# EAGLE board fonte (EAGLE 5.06)
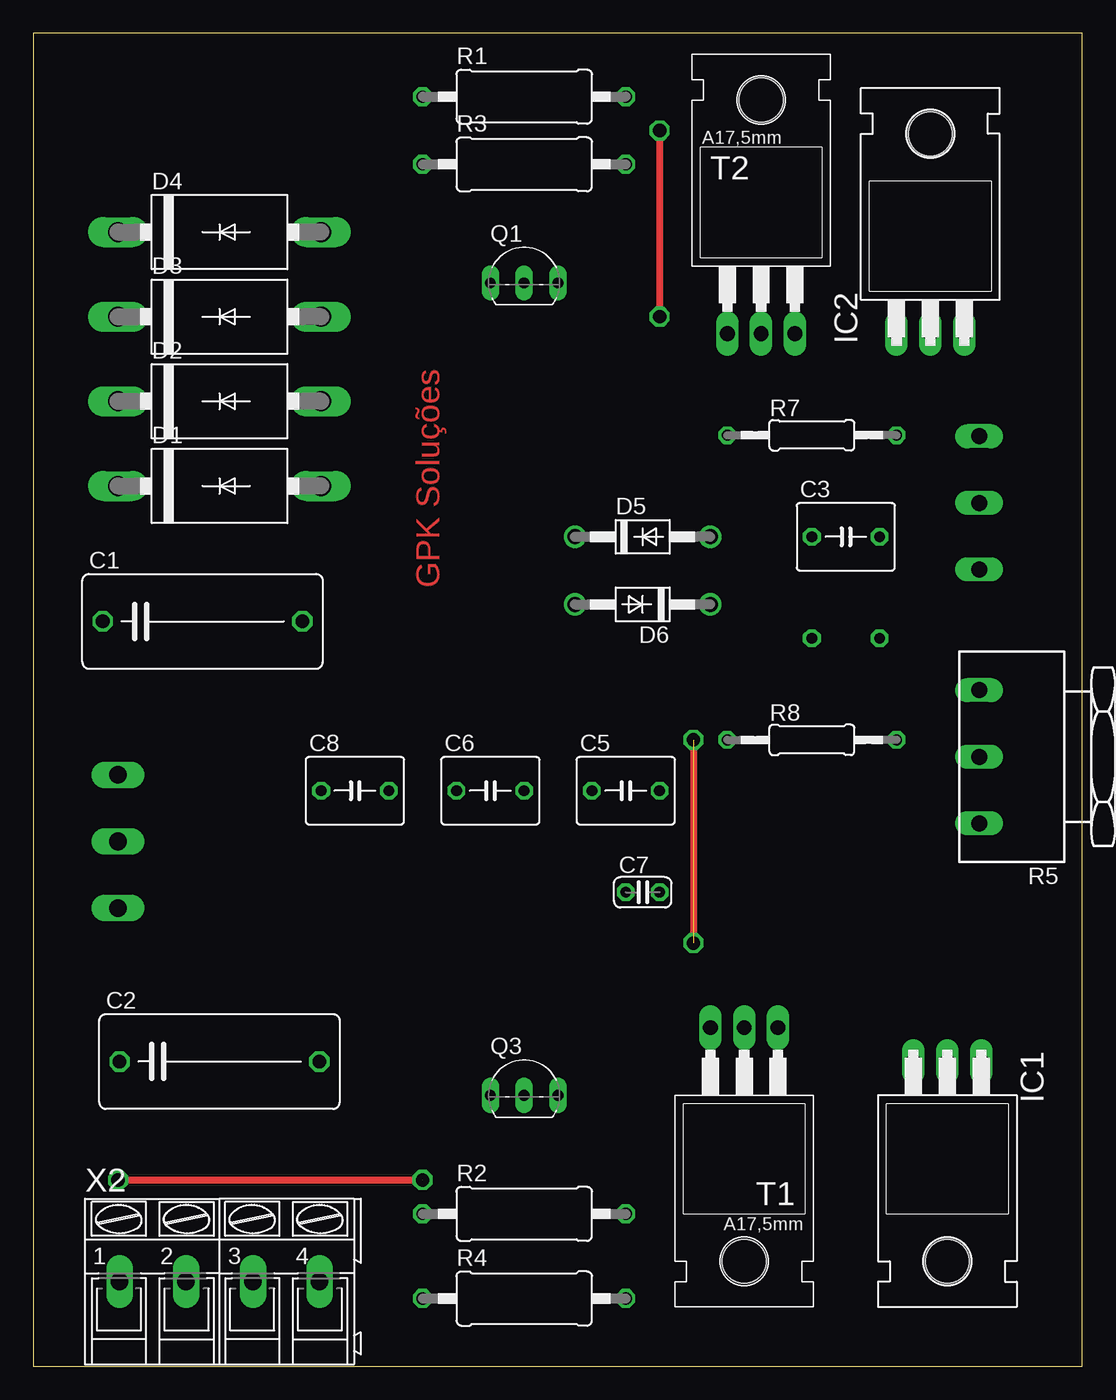
[diagram p0: board, top side]
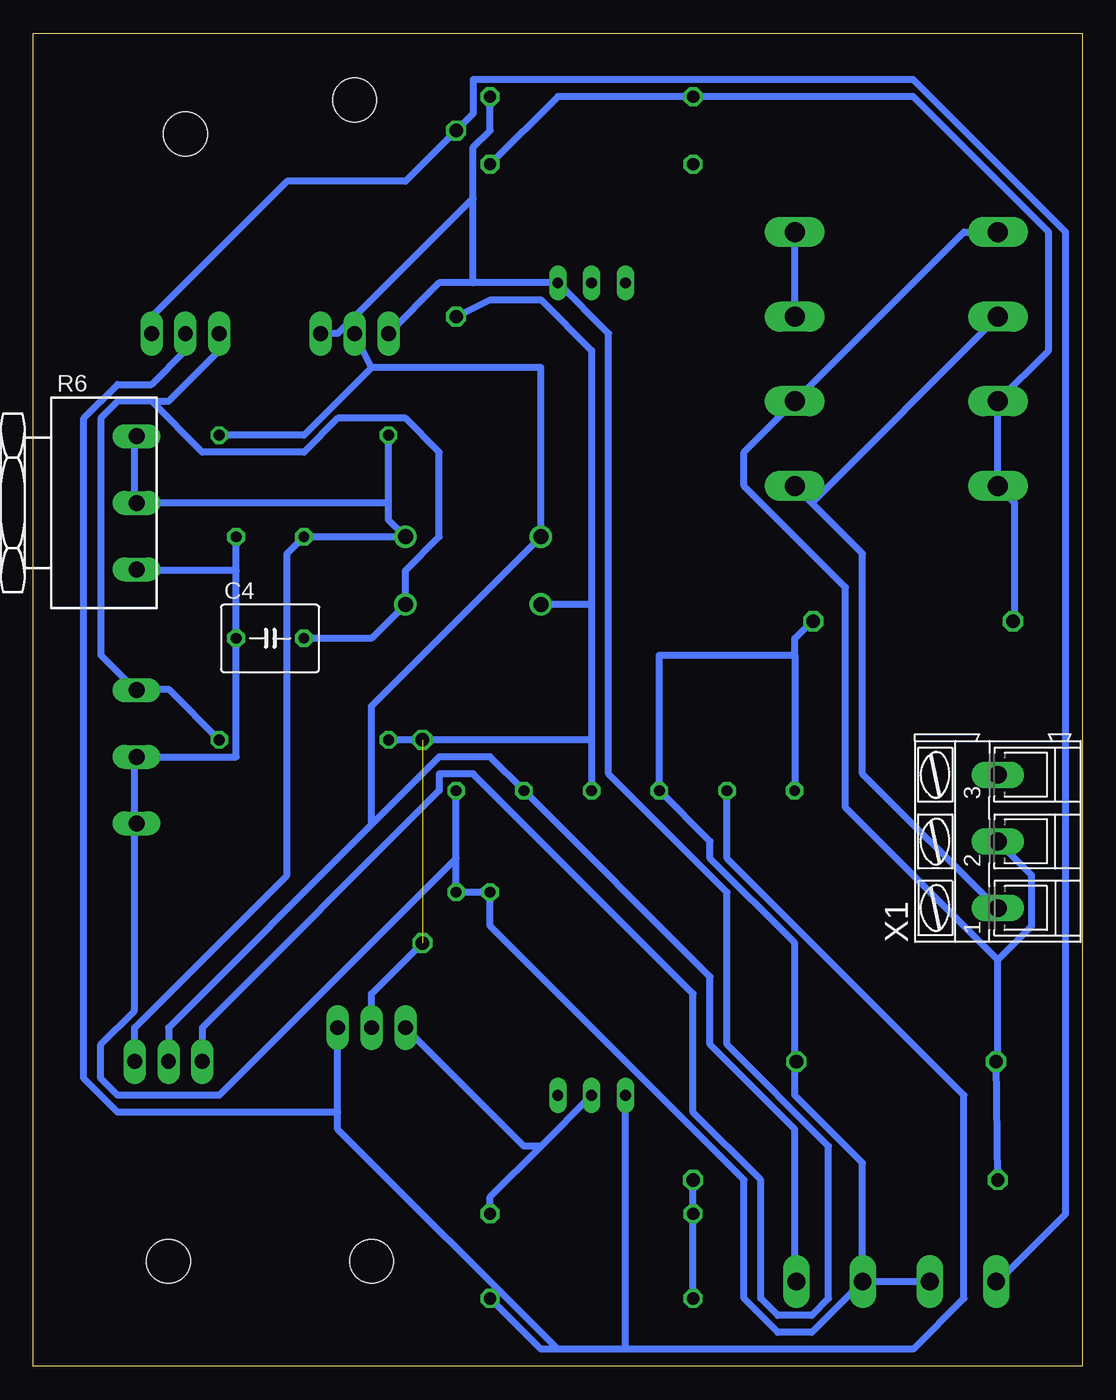
[diagram p1: board, bottom side, seen from below]

Size 78.72 x 100 mm. Coordinates in mm from the lower left corner, seen from the top.
Outline: 0,0 78.72,0 78.72,100 0,100 0,0
Copper layers (1*16): Top 0.035mm / dielectric 1.5mm / Bottom 0.035mm
Design rules "default *": minimum track width 20mil, minimum drill 24mil, track to track 8mil, track to pad 8mil, pad to pad 8mil, via to via 8mil, smd to smd 8mil, copper to edge 40mil, drill to drill 8mil, minimum pad ring 10mil, minimum via ring 8mil, stop-mask expansion 4mil, vias tented up to drill 0mil, thermal gap 10mil

## Footprints (pad centres in the part's own frame; a part is rotated, then mirrored left to right if it is on the bottom)
C150-072X183 = drill 1.016 octagon: 1 -7.493,0; 2 7.493,0
C050-050X075 = drill 0.813 octagon: 1 -2.54,0; 2 2.54,0
C025-024X044 = drill 0.813 octagon: 1 -1.27,0; 2 1.27,0
DO201-15 = drill 1.499 long: A 7.62,0; C -7.62,0
DO41-10 = drill 1.118 round: A 5.08,0; C -5.08,0
TO220H = drill 1.118 long: 1 -2.54,-10.16; 2 0,-10.16; 3 2.54,-10.16 | hole 3.302: 0,4.826
TO92-BCE = drill 0.813 long: B 2.54,0; C 0,0; E -2.54,0
TO92-EBC = drill 0.813 long: B 0,-1.27; C -2.54,-1.27; E 2.54,-1.27
0411/15 = drill 0.914 octagon: 1 -7.62,0; 2 7.62,0
PC16S = drill 1.2 long: 1A -5,6.5; 1E 5,6.5; 1S 0,6.5
0207/12 = drill 0.813 octagon: 1 -6.35,0; 2 6.35,0
TO220 = drill 1.118 long: 1 -2.54,-6.35; 2 0,-6.35; 3 2.54,-6.35 | hole 3.302: 0,11.176
AK300/3 = drill 1.321 long: 1 -5.004,0; 2 0,0; 3 5.004,0
AK300/4 = drill 1.321 long: 1 -7.493,0; 2 -2.515,0; 3 2.515,0; 4 7.493,0

## Placement (x,y rotation side)
C1  [C150-072X183]  12.7,55.88 0 top
C2  [C150-072X183]  13.97,22.86 0 top
C3  [C050-050X075]  60.96,62.23 0 top
C4  [C050-050X075]  60.96,54.61 0 bottom
C5  [C050-050X075]  44.45,43.18 0 top
C6  [C050-050X075]  34.29,43.18 0 top
C7  [C025-024X044]  45.72,35.56 0 top
C8  [C050-050X075]  24.13,43.18 0 top
D1  1N5400  [DO201-15]  13.97,66.04 0 top
D2  1N5400  [DO201-15]  13.97,72.39 0 top
D3  1N5400  [DO201-15]  13.97,78.74 0 top
D4  1N5400  [DO201-15]  13.97,85.09 0 top
D5  1N4004  [DO41-10]  45.72,62.23 0 top
D6  1N4004  [DO41-10]  45.72,57.15 180 top
IC1  337T  [TO220H]  68.58,12.7 180 top
IC2  337T  [TO220H]  67.31,87.63 0 top
Q1  BC636  [TO92-BCE]  36.83,81.28 0 top
Q3  BC618  [TO92-EBC]  36.83,21.59 0 top
R1  [0411/15]  36.83,95.25 0 top
R2  [0411/15]  36.83,11.43 0 top
R3  [0411/15]  36.83,90.17 0 top
R4  [0411/15]  36.83,5.08 0 top
R5  PC16S  [PC16S]  77.47,45.72 90 top
R6  PC16S  [PC16S]  77.47,64.77 270 bottom
R7  [0207/12]  58.42,69.85 0 top
R8  [0207/12]  58.42,46.99 0 top
T1  TIP31  [TO220]  53.34,19.05 180 top
T2  TIP32  [TO220]  54.61,83.82 0 top
X1  [AK300/3]  6.35,39.37 90 bottom
X2  [AK300/4]  13.97,6.35 0 top

## Library data of the parts
C1-C8 = rcl
D1-D6 = diode
IC1 IC2 = linear
Q1 = transistor-pnp
Q3 = transistor-npn
R1-R4 R7 R8 = resistor
R5 R6 = piher
T1 T2 = transistor
X1 X2 = con-ptr500

## Nets
GND: C1.2 C2.2 C3.2 C4.1 C5.2 C6.1 C7.1 C7.2 C8.1 R5.1A R5.1S R6.1E X2.2 X2.3
N$1: D1.A D3.C X1.1
N$2: D3.A D4.A
N$3: C1.1 D1.C D2.C R1.1 R3.2
N$4: C2.1 D2.A D4.C R2.1 R4.1 X1.2
N$5: IC1.3 Q1.B R1.2 T2.1 T2.3
N$6: C5.1 D5.C IC1.2 R7.2 T2.2 X2.4
N$7: C3.1 D5.A IC1.1 R6.1A R6.1S R7.1
N$8: C8.2 IC2.2 Q3.C R4.2 T1.1
N$9: X1.3
N$10: C6.2 D6.A IC2.3 R8.1 T1.2 X2.1
N$11: C4.2 D6.C IC2.1 R5.1E R8.2
N$13: Q3.B R2.2 T1.3

## Tracks (layer width: path | path; a pad name or v marks a point on that pad's centre or on a via)
GND
  Bottom 0.508: 71.12,40.64 71.12,45.72 R5.1S 63.5,45.72 C4.1 63.5,59.69 | 63.5,59.69 C3.2 | 63.5,59.69 69.85,59.69 R6.1E | 21.59,53.34 21.59,54.61 20.32,55.88 C1.2 | 21.59,53.34 C8.1 | 21.59,53.34 31.75,53.34 C6.1 27.94,39.37 27.94,38.1 21.59,31.75 21.59,22.86 | 46.99,38.1 C7.2 C7.1 44.45,33.02 25.4,13.97 25.4,5.08 22.86,2.54 20.32,2.54 16.51,6.35 | 46.99,38.1 C5.2 | 21.59,22.86 21.59,20.32 16.51,15.24 16.51,6.35 | 11.43,6.35 X2.2 X2.3 16.51,6.35 | 21.59,22.86 C2.2 | 71.12,40.64 71.12,26.67 73.66,24.13 73.66,21.59 72.39,20.32 64.77,20.32 46.99,38.1 | 71.12,40.64 R5.1A
N$1
  Bottom 0.508: 20.32,64.77 D1.A | 20.32,64.77 16.51,60.96 16.51,44.45 6.35,34.29 X1.1 | 20.32,64.77 D3.C
N$2
  Bottom 0.508: D3.A D4.A
N$3
  Bottom 0.508: R3.2 39.37,95.25 R1.1 12.7,95.25 2.54,85.09 2.54,76.2 D2.C D1.C 5.08,64.77 5.08,55.88 C1.1
N$4  (via drill 1 pad 1.02)  (1 unrouted)
  Top 0.508: v6.35,13.97 29.21,13.97
  Bottom 0.508: 6.35,30.48 6.35,22.86 C2.1 v6.35,13.97 | 6.35,30.48 3.81,33.02 3.81,36.83 X1.2 | D4.C 8.89,85.09 D2.A 25.4,68.58 25.4,66.04 17.78,58.42 17.78,41.91 6.35,30.48 | R4.1 R2.1 29.21,13.97
N$5
  Bottom 0.508: 45.72,81.28 Q1.B 35.56,77.47 35.56,44.45 26.67,35.56 26.67,24.13 19.05,16.51 19.05,5.08 20.32,3.81 22.86,3.81 24.13,5.08 24.13,13.97 29.21,19.05 29.21,27.94 45.72,44.45 48.26,44.45 48.26,43.18 66.04,25.4 IC1.3 | 45.72,81.28 48.26,81.28 T2.1 | R1.2 44.45,92.71 45.72,91.44 45.72,87.63 | 45.72,81.28 45.72,87.63 | T2.3 55.88,77.47 45.72,87.63
N$6
  Bottom 0.508: R7.2 58.42,69.85 53.34,74.93 | 53.34,74.93 40.64,74.93 D5.C 53.34,49.53 53.34,40.64 | 53.34,74.93 T2.2 | 53.34,40.64 68.58,25.4 IC1.2 | 53.34,40.64 48.26,45.72 44.45,45.72 C5.1 27.94,29.21 27.94,24.13 21.59,17.78 21.59,6.35 X2.4
N$7
  Bottom 0.508: R6.1A 71.12,69.85 71.12,64.77 R6.1S 52.07,64.77 | 52.07,64.77 52.07,63.5 D5.A C3.1 59.69,60.96 59.69,36.83 71.12,25.4 IC1.1 | 52.07,64.77 R7.1
N$8
  Bottom 0.508: C8.2 26.67,38.1 8.89,20.32 8.89,5.08 12.7,1.27 34.29,1.27 | 39.37,1.27 40.64,1.27 R4.2 | 34.29,1.27 39.37,1.27 | 34.29,1.27 Q3.C | 55.88,19.05 55.88,17.78 39.37,1.27 | 55.88,19.05 T1.1 | IC2.2 67.31,76.2 69.85,73.66 72.39,73.66 74.93,71.12 74.93,21.59 72.39,19.05 55.88,19.05
N$10  (via drill 1 pad 1.02)  (2 unrouted)
  Top 0.508: v46.99,92.71 v46.99,78.74 | v49.53,46.99 49.53,31.75
  Bottom 0.508: IC2.3 69.85,78.74 59.69,88.9 50.8,88.9 v46.99,92.71 45.72,93.98 45.72,96.52 12.7,96.52 1.27,85.09 1.27,11.43 6.35,6.35 X2.1 | 36.83,46.99 C6.2 | 36.83,57.15 36.83,46.99 | 36.83,46.99 v49.53,46.99 R8.1 | 36.83,57.15 D6.A | 36.83,57.15 36.83,76.2 40.64,80.01 44.45,80.01 v46.99,78.74 | T1.2 53.34,27.94 49.53,31.75
N$11
  Bottom 0.508: C4.2 53.34,54.61 D6.C 50.8,59.69 48.26,62.23 48.26,68.58 50.8,71.12 55.88,71.12 58.42,68.58 66.04,68.58 69.85,72.39 | R8.2 68.58,50.8 69.85,50.8 R5.1E 71.12,50.8 73.66,53.34 73.66,71.12 72.39,72.39 69.85,72.39 | IC2.1 64.77,76.2 68.58,72.39 69.85,72.39
N$13
  Bottom 0.508: 40.64,16.51 44.45,12.7 R2.2 | 40.64,16.51 Q3.B | T1.3 41.91,16.51 40.64,16.51
S$11  (via drill 1 pad 1.02)
  other vias: 29.21,13.97
S$12  (via drill 1 pad 1.02)
  other vias: 6.35,13.97
S$13  (via drill 1 pad 1.02)
  other vias: 49.53,31.75

## Text on the board
Top: GPK Soluções